# Altium PCB DB.PcbDoc (part 3 of 3)
Units mm, origin at the board's own origin, x right, y up, seen from the top; angles counter-clockwise.
Board outline 248 x 160 mm, 2 copper layers (Top Layer, Bottom Layer), stack 1.571 mm thick; 227 components, 245 nets, 960 pads, 72 vias.
Unrouted connection lines stored in the file: 1.
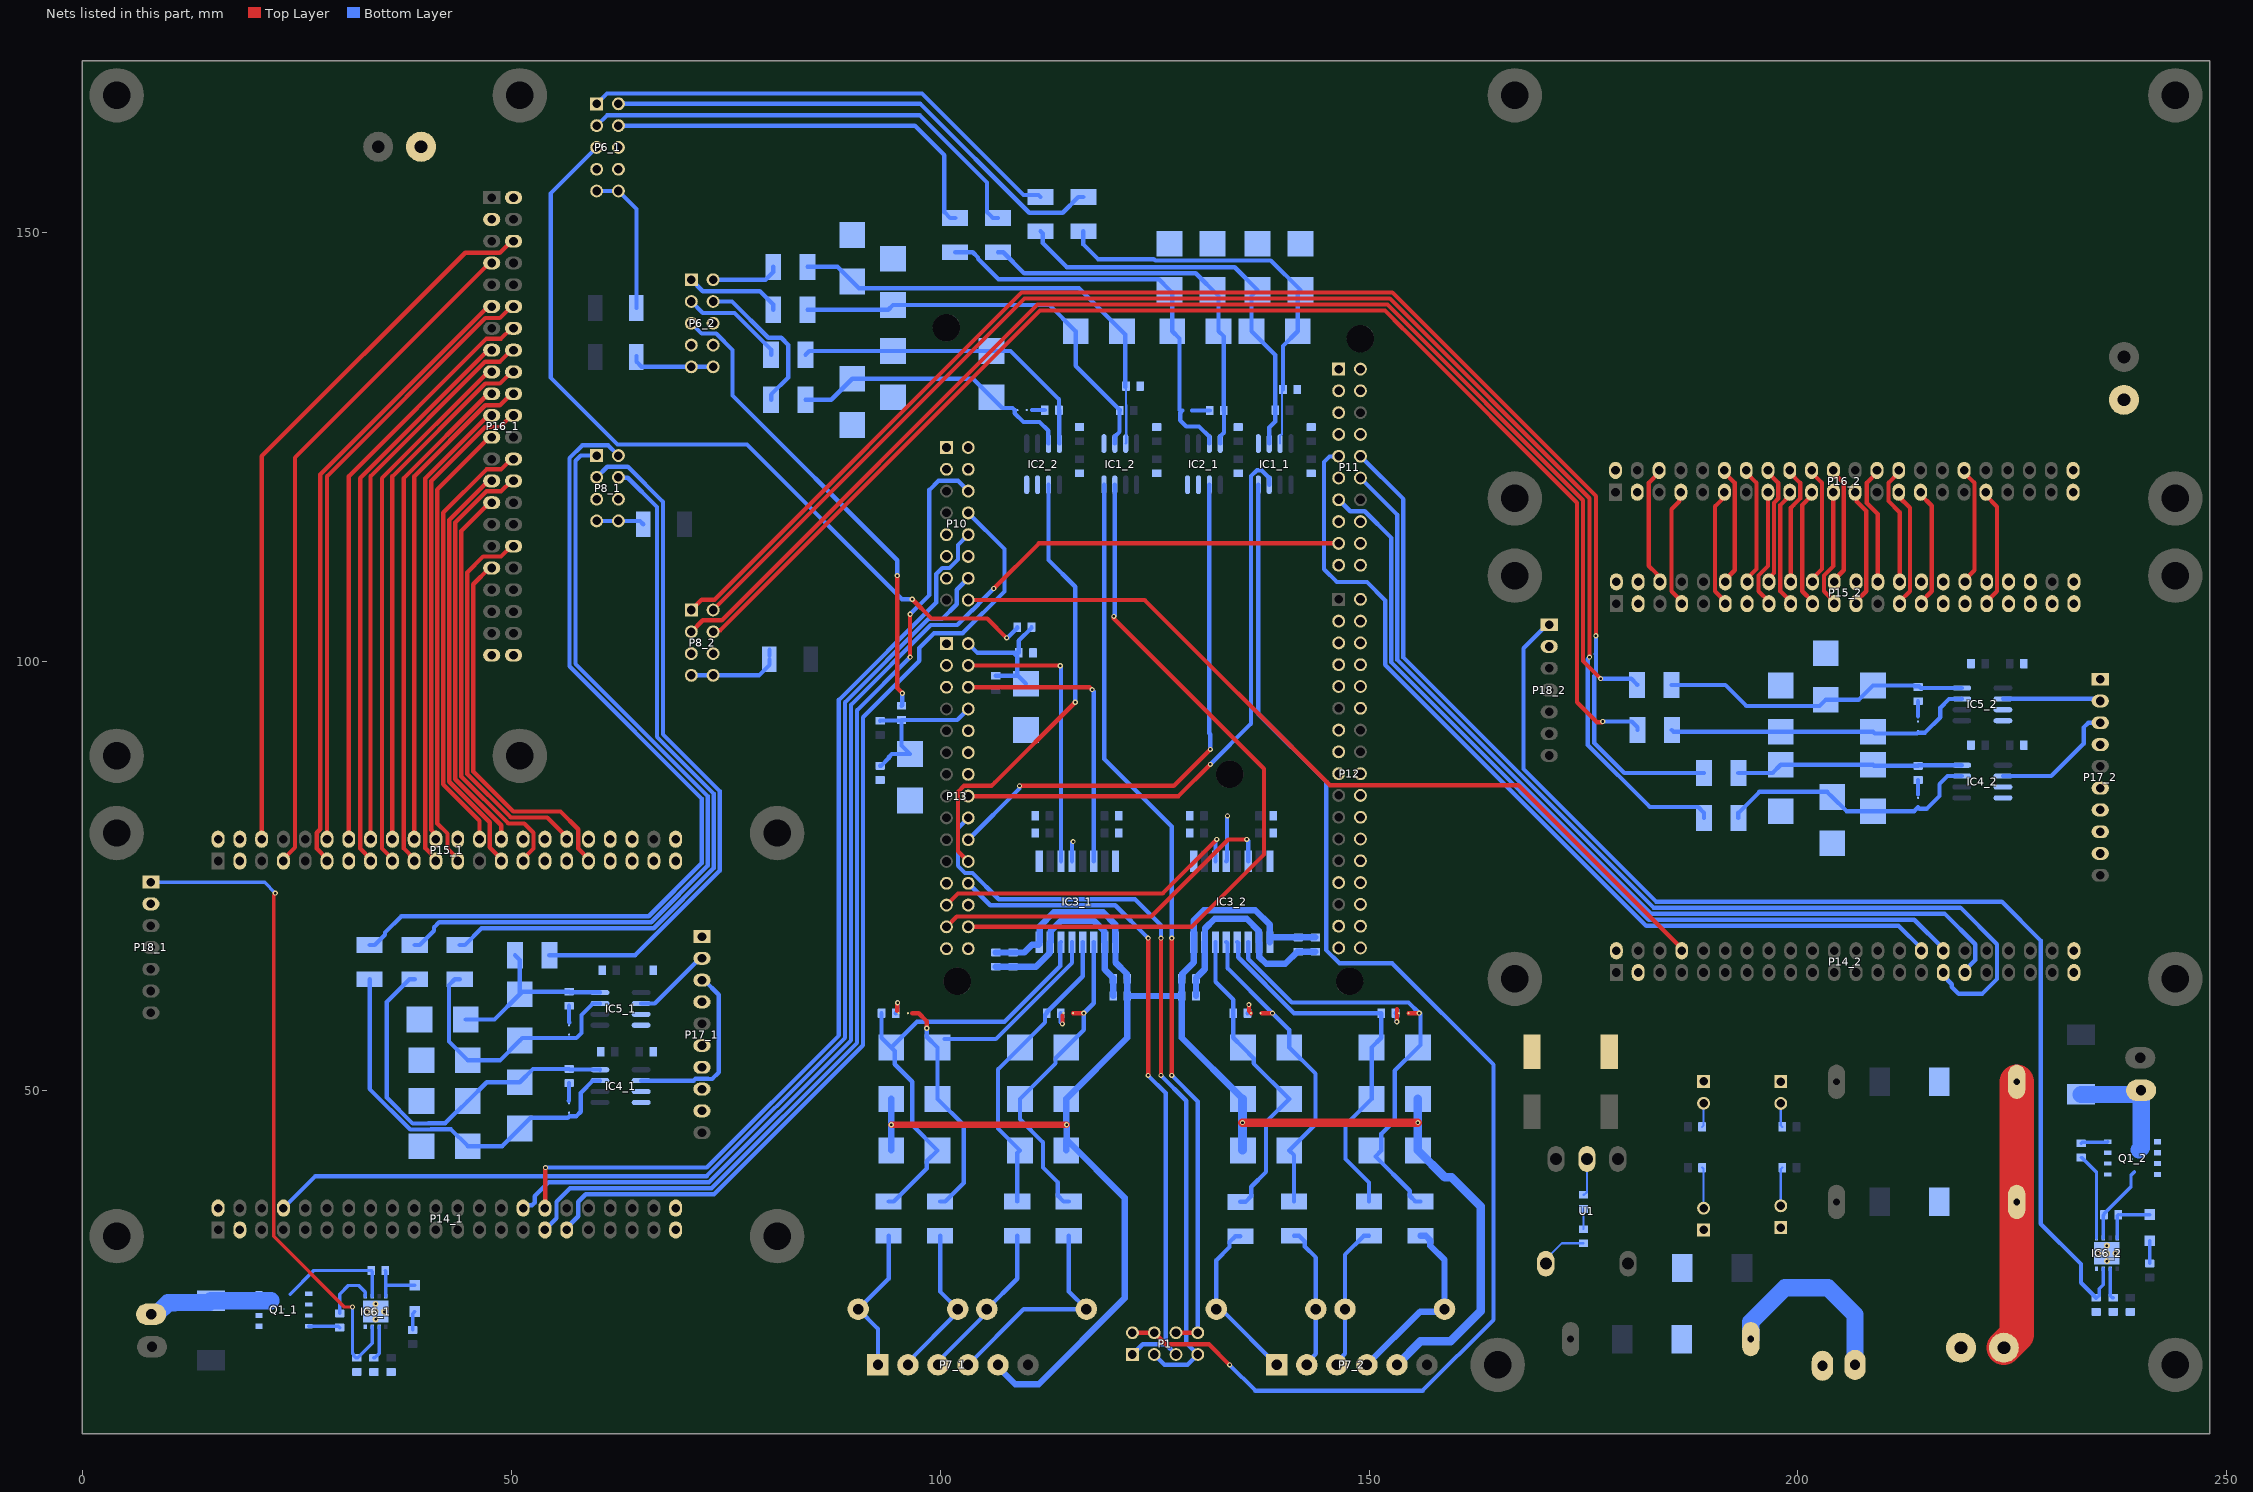
[diagram p2: the nets of this part, all layers, seen from the top]

## Via types
v1: diameter 0.6, hole 0.3, Top Layer to Bottom Layer, 60 vias
v2: diameter 0.7, hole 0.3, Top Layer to Bottom Layer, 10 vias
v3: diameter 1.27, hole 0.711, Top Layer to Bottom Layer, 2 vias

## Nets (pads, with @x,y where several pads share a name; then routed paths per layer and width w, separated by ;. In a path a pad name is that pad's centre, name@x,y a point inside that pad or via, vN(x,y) a via of type N, cw(c..) or ccw(c..) an arc to the next point about the centre after c; other vN are vias at no path point) (continued)
A+_1: F12_1.1 P8_1.1 | length 94.5
  Bottom Layer w0.5: F12_1.1@38.75,66.95 39.35,66.95 41,68.6 41,69 41.6,69.6 66.32,69.6 72.9,76.18 72.9,84.32 57.5,99.72 57.5,123.4 58.1,124 P8_1.1@59.96,124
A+_2: F12_2.1 P8_2.1 | length 173.7
  Top Layer w0.5: P8_2.1@71,106 72.2,107.2 73.7,107.2 109.5,143 152.72,143 176.45,119.27 v1(176.45,103)
  Bottom Layer w0.5: v1(176.45,103) 176.45,100.911 176.4,100.861 176.45,100.811 176.45,98.511 176.25,98.311 176.25,90.5 179.75,87 F12_2.1@189.05,87
A-_1: F13_1.1 P8_1.2 | length 103.2
  Bottom Layer w0.5: F13_1.1@33.5,66.95 34.1,66.95 35.3,68.15 35.3,68.4 37.2,70.3 66.03,70.3 72.2,76.47 72.2,84.03 56.8,99.43 56.8,123.7 58.3,125.2 61.3,125.2 P8_1.2@62.5,124
A-_2: F13_2.1 P8_2.2 | length 173.1
  Top Layer w0.5: P8_2.2@73.54,106 109.84,142.3 152.43,142.3 175.7,119.03 v1(175.7,100.5)
  Bottom Layer w0.5: v1(175.7,100.5) 175.7,100.473 175.5,100.273 175.5,90.26 182.735,83.025 188.375,83.025 189.05,82.35 F13_2.1@189.05,81.75
AGND: P12.3
az_br: IC6_1.3 P18_1.1 R18_1.2 | length 78.3
  Top Layer w0.4: v1(22.5,73) 22.5,72.946 22.3,72.746 22.3,33.011 30.561,24.75 v1(31.5,24.75)
  Bottom Layer w0.4: P18_1.1@8,74.28 8.03,74.25 21.25,74.25 v1(22.5,73) ; v1(31.5,24.75) 31.5,19.325 31.65,19.175 31.65,19.075 31.9,18.825 32.1,18.825 33.8,20.525 IC6_1.3@33.8,22.43
az_enc_A: IC4_1.2 P17_1.3 | length 21.2
  Bottom Layer w0.5: IC4_1.2@65.15,51.135 71.278,51.135 71.493,51.35 72.987,51.35 73.011,51.326 73.426,51.326 74.2,52.1 74.2,61.14 72.49,62.85 P17_1.3@72.24,62.85
az_enc_B: IC5_1.2 P17_1.2 | length 9.3
  Bottom Layer w0.5: IC5_1.2@65.15,60.135 66.735,60.135 71.99,65.39 P17_1.2@72.24,65.39
az_sai_fs: IC1_1.3 P13.16 | length 68.9
  Top Layer w0.5: P13.16@103.28,84.3 127.8,84.3 v1(131.5,88)
  Bottom Layer w0.5: v1(131.5,88) 136.25,92.75 136.25,121.616 136.927,122.293 137.472,122.293 138.365,121.4 IC1_1.3@138.365,120.6
az_sai_sck: P1.3 P1.7 P13.18 | length 90.6
  Top Layer w0.5: v1(125.75,51.75) v1(125.75,67.75)
  Bottom Layer w0.5: P13.18@103.354,81.686 P13.18@103.28,81.76 102.08,80.56 102.08,76.17 102.91,75.34 103.777,75.34 106.842,72.275 122.725,72.275 125.75,69.25 v1(125.75,67.75) ; P1.3@124.96,19.21 126.16,18.01 128.84,18.01 P1.7@130.04,19.21 128.7,20.55 128.7,48.8 v1(125.75,51.75)
az_sai_sck_dr: IC1_1.4 P1.2 P1.4 | length 160.6
  Top Layer w0.5: P1.2@122.42,21.75 P1.4@124.96,21.75 126.3,20.41 131.34,20.41 v1(133.75,18)
  Bottom Layer w0.5: v1(133.75,18) 136.75,15 156.25,15 164.5,23.25 164.5,53 152.69,64.81 146.553,64.81 145,66.363 145,86 137.095,93.905 IC1_1.4@137.095,120.6
az_sai_sd: IC2_1.2 P13.20 | length 63.7
  Top Layer w0.5: v1(109.25,85.5) 127.25,85.5 v1(131.5,89.75)
  Bottom Layer w0.5: P13.20@103.28,79.22 109.25,85.19 v1(109.25,85.5) ; IC2_1.2@131.385,120.6 131.385,91.642 131.5,91.527 v1(131.5,89.75)
az_spi_cs: P11.17 P14_1.30 | length 150.6
  Top Layer w0.5: v1(106.25,108.5) 111.514,113.764 P11.17@146.46,113.764
  Bottom Layer w0.5: P14_1.30@51.39,36.277 51.714,36.601 52.437,36.601 52.73,36.894 52.73,37.667 54.363,39.3 73.07,39.3 89.6,55.83 89.6,94.94 98.91,104.25 102,104.25 103.71,105.96 103.777,105.96 104.48,106.663 104.48,106.73 v1(106.25,108.5)
az_spi_en: P10.14 P14_1.8 | length 134.1
  Bottom Layer w0.5: P14_1.8@23.45,36.277 27.173,40 72.78,40 88.9,56.12 88.9,95.23 98.62,104.95 100.227,104.95 101.94,106.663 101.94,108.36 P10.14@103.28,109.7
az_spi_miso: P10.8 P14_1.33 | length 117.2
  Bottom Layer w0.5: P14_1.33@56.47,33.737 56.47,33.987 57.81,35.327 57.81,37.024 58.686,37.9 73.65,37.9 91,55.25 91,93.5 97.571,100.071 97.571,101.571 99.28,103.28 102.624,103.28 107.5,108.156 107.5,113.1 P10.8@103.28,117.32
az_spi_mosi: P10.10 P14_1.32 | length 110.5
  Top Layer w0.5: P14_1.32@53.93,36.277 53.965,36.312 53.965,40.965 v1(54,41)
  Bottom Layer w0.5: v1(54,41) 72.79,41 88.2,56.41 88.2,95.52 99.54,106.86 99.54,110.197 100.243,110.9 101.097,110.9 102.08,111.883 102.08,113.58 P10.10@103.28,114.78
az_spi_sck: P10.6 P14_1.31 | length 120
  Top Layer w0.5: v1@96.501,100.499 v1(96.5,105.5)
  Bottom Layer w0.5: P14_1.31@53.93,33.737 55.289,35.096 55.289,35.511 55.27,35.53 55.27,37.024 56.846,38.6 73.36,38.6 90.3,55.54 90.3,94.297 v1(96.502,100.498) ; v1(96.5,105.5) 98.75,107.75 98.75,120 99.81,121.06 102.08,121.06 P10.6@103.28,119.86
B+_1: F14_1.1 P8_1.3 | length 79.6
  Bottom Layer w0.5: F14_1.1@54.45,65.75 64.45,65.75 74.3,75.6 74.3,84.9 67.7,91.5 67.7,118.6 63.6,122.7 61.2,122.7 P8_1.3@59.96,121.46
B+_2: F14_2.1 P8_2.3 | length 155.4
  Top Layer w0.5: P8_2.3@71,103.46 72.34,104.8 74.56,104.8 111.36,141.6 152.14,141.6 174.95,118.79 174.95,100.05 v1(177,98)
  Bottom Layer w0.5: v1(177,98) 180.575,98 181.25,97.325 F14_2.1@181.25,97.25
B-_1: F15_1.1 P8_1.4 | length 84.1
  Bottom Layer w0.5: F15_1.1@44,66.95 44.6,66.95 46.55,68.9 66.61,68.9 73.6,75.89 73.6,84.61 67,91.21 67,118 63.581,121.419 62.541,121.419 P8_1.4@62.5,121.46
B-_2: F15_2.1 P8_2.4 | length 157.3
  Top Layer w0.5: P8_2.4@73.54,103.46 73.731,103.651 74.401,103.651 111.65,140.9 151.85,140.9 153.9,138.85 ; 154,138.75 174.25,118.5 174.25,95.25 176.58,92.92 177.17,92.92 v1(177.25,93)
  Bottom Layer w0.5: v1(177.25,93) 180.625,93 181.3,92.325 F15_2.1@181.3,92
ccw_button_az: C3_1.2 D11_1.2 P13.2 R10_1.2 R11_1.1 | length 16.6
  Bottom Layer w0.5: P13.2@103.28,102.08 104.36,101 108.675,101 ; R10_1.2@106.5,98.325 D11_1.2@109,98.325 ; D11_1.2@110,97.4 109.075,98.325 D11_1.2@109,98.325 ; R11_1.1@110.65,104 110.65,103.9 109.175,102.425 C3_1.2@109.175,101 108.675,101 ; 108.675,101 108.675,100.9 109,100.575 D11_1.2@109,98.325
ccw_button_el: C3_2.2 D11_2.2 P13.8 R10_2.2 R11_2.1 | length 19.4
  Bottom Layer w0.5: C3_2.2@93,87.825 93.1,87.825 94.007,88.732 94.007,88.832 94.375,89.2 D11_2.2@96.5,89.2 95.5,90.2 R11_2.1@95.5,93.175 ; R10_2.2@93,93.075 93.05,93.125 95.45,93.125 R11_2.1@95.5,93.175 ; P13.8@103.28,94.46 101.995,93.175 R11_2.1@95.5,93.175
ccw_in_1: P6_1.5 R11_1.2 | length 96.6
  Top Layer w0.5: v1(96.75,107.25) 99,105 105.5,105 v1(107.75,102.75)
  Bottom Layer w0.5: P6_1.5@59.96,159.92 54.6,154.56 54.6,133.1 62.4,125.3 77.5,125.3 95.55,107.25 v1(96.75,107.25) ; v1(107.75,102.75) 107.769,102.769 107.869,102.769 109,103.9 R11_1.2@109,104
ccw_in_2: P6_2.5 R11_2.2 | length 55.8
  Top Layer w0.5: v1(95,110) 95,96.9 v1(95.6,96.3)
  Bottom Layer w0.5: P6_2.5@71,139.42 72.2,138.22 73.897,138.22 75.8,136.317 75.8,131 95,111.8 v1(95,110) ; R11_2.2@95.5,94.825 95.581,94.906 95.581,96.281 v1(95.6,96.3)
clock+_1: F5_1.1 P6_1.1 | length 57.2
  Bottom Layer w0.5: P6_1.1@59.96,165 61.16,166.2 97.9,166.2 109.718,154.382 111.468,154.382 F5_1.1@111.7,154.15
clock+_2: F5_2.1 P6_2.1 | length 11.4
  Bottom Layer w0.5: P6_2.1@71,144.5 72.34,143.16 78.99,143.16 80.55,141.6 F5_2.1@80.55,141
clock-_1: F4_1.1 P6_1.2 | length 60.3
  Bottom Layer w0.5: P6_1.2@62.5,165 97.7,165 110.4,152.3 114.3,152.3 115,153 115.425,153.425 115.425,153.475 116.1,154.15 F4_1.1@116.7,154.15
clock-_2: F4_2.1 P6_2.2 | length 8
  Bottom Layer w0.5: P6_2.2@73.54,144.5 79.65,144.5 80.55,145.4 F4_2.1@80.55,146
data+_1: F6_1.1 P6_1.3 | length 54.3
  Bottom Layer w0.5: P6_1.3@59.96,162.46 61.16,163.66 97.64,163.66 105.475,155.825 105.475,152.375 106.15,151.7 F6_1.1@106.75,151.7
data+_2: F6_2.1 P6_2.3 | length 12.2
  Bottom Layer w0.5: P6_2.3@71,141.96 72.34,140.62 76.03,140.62 80.3,136.35 F6_2.1@80.3,135.75
data-_1: F7_1.1 P6_1.4 | length 47.6
  Bottom Layer w0.5: P6_1.4@62.5,162.46 97.04,162.46 100.495,159.005 100.495,152.375 101.17,151.7 F7_1.1@101.75,151.7
data-_2: F7_2.1 P6_2.4 | length 18.1
  Bottom Layer w0.5: P6_2.4@73.54,141.96 75.74,141.96 79.975,137.725 81.475,137.725 82.3,136.9 82.3,133.1 80.3,131.1 F7_2.1@80.3,130.5
el_br: IC6_2.3 P18_2.1 R18_2.2 | length 134.9
  Bottom Layer w0.4: R18_2.2@234.75,25.825 234.85,25.825 235.1,26.075 235.1,26.85 235.6,27.35 IC6_2.3@235.6,29.215
  Bottom Layer w0.5: P18_2.1@171,104.28 170.75,104.28 168,101.53 168,87.46 183.46,72 223.75,72 228.29,67.46 228.29,34.46 233,29.75 233,27.575 R18_2.2@234.75,25.825
el_enc_A: IC4_2.2 P17_2.3 | length 15
  Bottom Layer w0.5: IC4_2.2@223.9,86.635 229.535,86.635 233.3,90.4 233.3,92.3 233.85,92.85 P17_2.3@235.24,92.85
el_enc_B: IC5_2.2 P17_2.2 | length 11.4
  Bottom Layer w0.5: IC5_2.2@223.9,95.635 234.474,95.635 234.719,95.39 P17_2.2@235.24,95.39
el_sai_fs: IC1_2.3 P13.28 | length 88.4
  Top Layer w0.5: P13.28@103.28,69.06 129.31,69.06 137.75,77.5 137.75,87.5 120.25,105 v1(120.25,105.25)
  Bottom Layer w0.5: v1(120.25,105.25) 120.25,105.277 120.365,105.392 IC1_2.3@120.365,120.6
el_sai_sck: P1.1 P1.5 P13.24 | length 77.9
  Top Layer w0.5: v1(124.25,51.75) v1(124.25,67.75)
  Bottom Layer w0.5: P13.24@103.28,74.14 105.845,71.575 112.908,71.575 120.425,71.575 v1(124.25,67.75) ; P1.1@122.42,19.21 123.62,20.41 126.3,20.41 ; v1(124.25,51.75) 126.3,49.7 126.3,20.41 ; P1.5@127.5,19.21 126.3,20.41
el_sai_sck_dr: IC1_2.4 P1.6 P1.8 | length 105.9
  Top Layer w0.5: v1(127,51.75) v1(127,67.75) ; P1.6@127.5,21.75 P1.8@130.04,21.75
  Bottom Layer w0.5: IC1_2.4@119.095,120.6 119.128,120.567 119.128,88.622 127,80.75 v1(127,67.75) ; v1@127.019,51.731 130.04,48.71 P1.8@130.04,21.75
el_sai_sd: IC2_2.2 P13.22 | length 53.4
  Top Layer w0.5: P13.22@103.28,76.68 102.08,77.88 102.08,84.797 102.783,85.5 106,85.5 106.349,85.849 v1(115.75,95.25)
  Bottom Layer w0.5: P13.22@103.28,76.68 P13.22@103.46,76.68 ; IC2_2.2@112.635,120.6 112.635,111.819 115.75,108.704 v1(115.75,95.25)
el_spi_cs: P11.9 P14_2.30 | length 107.1
  Bottom Layer w0.5: P11.9@146.46,123.924 146.417,123.881 145.381,123.881 144.75,123.25 144.75,110.75 146.25,109.25 149.75,109.25 151.9,107.1 151.9,100.957 151.9,99.6 182.3,69.2 211.717,69.2 214.39,66.527 P14_2.30@214.39,66.277
el_spi_en: P10.16 P14_2.8 | length 100.3
  Top Layer w0.5: P10.16@103.28,107.16 123.84,107.16 145.42,85.58 167.397,85.58 186.45,66.527 P14_2.8@186.45,66.277
el_spi_miso: P11.12 P14_2.33 | length 107.9
  Bottom Layer w0.5: P11.12@149,121.384 153.3,117.084 153.3,101.537 153.3,100.18 182.88,70.6 217.094,70.6 220.67,67.024 220.67,65.187 219.47,63.987 P14_2.33@219.47,63.737
el_spi_mosi: P11.13 P14_2.32 | length 100.9
  Bottom Layer w0.5: P11.13@146.46,118.844 147.8,117.504 149.497,117.504 152.6,114.401 152.6,101.247 152.6,99.89 182.59,69.9 213.557,69.9 216.93,66.527 P14_2.32@216.93,66.277
el_spi_sck: P11.10 P14_2.31 | length 121
  Bottom Layer w0.5: P11.10@149,123.924 154,118.924 154,100.47 183.17,71.3 218.934,71.3 223.21,67.024 223.21,62.99 221.47,61.25 218.75,61.25 217.936,62.064 217.936,62.371 216.93,63.377 P14_2.31@216.93,63.737
ENC1_N_IN_1: P17_1.1
ENC1_N_IN_2: P17_2.1
ENC2_A_IN_1: P17_1.8
ENC2_A_IN_2: P17_2.8
ENC2_B_IN_1: P17_1.7
ENC2_B_IN_2: P17_2.7
ENC2_N_IN_1: P17_1.6
ENC2_N_IN_2: P17_2.6
GND: C1.2 C2.2 C3_1.1 C3_2.1 C4_1.1 C4_2.1 C5_1.1 C5_2.1 C6_1.1 C6_2.1 C7_1.1 C7_2.1 C8_1.2 C8_2.2 C9_1.2 C9_2.2 C12_1.1 C12_2.1 C13_1.1 C13_2.1 C16_1.1 C16_2.1 C17_1.1 C17_2.1 C18_1.1 C18_2.1 C19_1.1 C19_2.1 C20_1.2 C20_2.2 D1.2 D2.2 D3.1 D4.2 D5_1.1 D5_2.1 D7_1.1 D7_2.1 D8_1.1 D8_2.1 D10_1.1 D10_2.1 D11_1.1 D11_2.1 D18_1.1 D18_2.1 D20_1.1 D20_2.1 D21_1.1 D21_2.1 D23_1.1 D23_2.1 IC1_1.5 IC1_2.5 IC2_1.3 IC2_1.4 IC2_2.3 IC2_2.4 IC3_1.1 IC3_1.4 IC3_1.8 IC3_2.1 IC3_2.4 IC3_2.8 IC4_1.3 IC4_1.4 IC4_2.3 IC4_2.4 IC5_1.3 IC5_1.4 IC5_2.3 IC5_2.4 IC6_1.4 IC6_1.9 IC6_2.4 IC6_2.9 LD1.1 LD2.1 LD3.1 LD4.1 P2.1 P3.1 P4.1 P5.1 P6_1.6 P6_1.7 P6_1.8 P6_2.6 P6_2.7 P6_2.8 P8_1.5 P8_1.6 P8_2.5 P8_2.6 P10.9 P10.11 P11.8 P12.5 P12.17 P12.22 P12.27 P13.12 P13.23 P14_1.2 P14_1.3 P14_1.43 P14_1.44 P14_2.2 P14_2.3 P14_2.43 P14_2.44 P15_1.2 P15_1.3 P15_1.43 P15_1.44 P15_2.2 P15_2.3 P15_2.43 P15_2.44 P16_1.2 P16_1.3 P16_1.43 P16_1.44 P16_2.2 P16_2.3 P16_2.43 P16_2.44 P17_1.4 P17_1.9 P17_2.4 P17_2.9 P18_1.2 P18_2.2 Q1_1.1 Q1_1.2 Q1_1.3 Q1_2.1 Q1_2.2 Q1_2.3 R6.1 R8_1.1 R8_2.1 R18_1.1 R18_2.1 R19_1.1 R19_2.1 U1.2 | length 12.1
  Bottom Layer w0.25: R6.1@175,37.825 175.075,37.825 175.4,38.15 U1.2@175.4,42
  Bottom Layer w0.5: IC3_1.4@115.365,76.71 115.365,78.865 v1(115.5,79) ; IC3_2.4@133.365,76.71 133.432,76.778 133.432,81.933 v1(133.5,82)
  other v2: 34.2,23.315 33.2,24.215 34.2,24.215 35.2,24.215 34.2,25.115 236,30.1 235,31 236,31 237,31 236,31.9
GND_line: C10_1.2 C10_2.2 C11_1.2 C11_2.2 C14_1.1 C14_2.1 C15_1.1 C15_2.1 D12_1.1 D12_2.1 D13_1.1 D13_2.1 D15_1.1 D15_2.1 D17_1.1 D17_2.1 IC3_1.9 IC3_1.16 IC3_2.9 IC3_2.16 P7_1.5 P7_2.5 | length 230.8
  Top Layer w0.75: v1(94.3,46) v1(114.75,46)
  Top Layer w1: v1(135.25,46.25) v1(155.7,46.25)
  Bottom Layer w0.15: v1@94.3,45.75 v1(94.3,46)
  Bottom Layer w0.75: D12_1.1@94.3,43 v1@94.3,45.75 ; v1(94.3,46) D13_1.1@94.3,49 ; P7_1.5@106.25,18.25 108.75,15.75 111.5,15.75 121.5,25.75 121.5,37.5 114.75,44.25 v1(114.75,46) ; C11_1.2@106.5,66.075 C10_1.2@108.5,66.075 109.825,66.075 110.75,67 111.505,67 111.555,67.05 IC3_1.16@111.555,67.29 111.605,67.34 111.605,69.105 113.25,70.75 119,70.75 120.395,69.355 120.395,67.34 IC3_1.9@120.445,67.29 120.445,64.915 121.75,63.61 121.75,63.075 C15_1.1@121.825,63 C14_1.1@121.825,61 ; D15_1.1@114.7,43 D15_1.1@114.7,44.25 ; v1@114.7,46 D17_1.1@114.7,49 121.825,56.125 C14_1.1@121.825,61 ; D12_2.1@135.3,49 128.175,56.125 C11_2.2@128.175,61 ; IC3_2.9@138.445,67.29 IC3_2.9@138.445,67.775 ; C15_2.1@143.75,67.825 138.495,67.825 IC3_2.9@138.445,67.775 ; C14_1.1@121.825,61 C11_2.2@128.175,61 ; C11_2.2@128.175,61 C14_2.1@128.175,63 128.25,63.075 128.25,63.61 129.555,64.915 IC3_2.16@129.555,67.29 129.555,69.805 130.75,71 136.75,71 138.445,69.305 IC3_2.9@138.445,67.775
  Bottom Layer w1: D13_2.1@135.3,43 135.25,43.05 v1(135.25,46.25) 135.25,48.95 D12_2.1@135.3,49 ; P7_2.5@153.25,18 156,20.75 159.5,20.75 163,24.25 163,36.5 159.625,39.875 158.825,39.875 D17_2.1@155.7,43 v1(155.7,46.25) D15_2.1@155.7,49
IOREF: P10.1
NetC10_1_1: C10_1.1 C11_1.1 C14_1.2 C15_1.2 IC3_1.10 IC3_1.15 | length 24.7
  Bottom Layer w0.75: C11_1.1@106.5,64.425 C10_1.1@108.5,64.425 111.175,64.425 112.215,65.465 112.218,65.465 112.775,66.022 112.775,67.24 IC3_1.15@112.825,67.29 112.875,67.34 112.875,68.558 114.067,69.75 117.933,69.75 119.125,68.558 119.125,67.34 IC3_1.10@119.175,67.29 119.175,64.1 120.175,63.1 C15_1.2@120.175,63 C14_1.2@120.175,61
NetC10_2_1: C10_2.1 C11_2.1 C14_2.2 C15_2.2 IC3_2.10 IC3_2.15 | length 26.2
  Bottom Layer w0.75: C11_2.1@129.825,61 C14_2.2@129.825,63 ; C14_2.2@129.825,63 129.825,63.1 130.825,64.1 IC3_2.15@130.825,67.29 130.875,67.34 130.875,68.875 132,70 135.75,70 137.125,68.625 137.125,67.34 137.225,67.24 137.225,65.525 138,64.75 140.225,64.75 141.65,66.175 C10_2.1@141.75,66.175 C15_2.2@143.75,66.175
NetC21_1_1: C21_1.1 D25_1.1 IC6_1.8 | length 6.5
  Bottom Layer w0.4: C21_1.1@35.325,29 35.4,28.925 35.4,27.463 ; IC6_1.8@35.4,26 35.4,27.463 ; D25_1.1@38.75,27.275 35.588,27.275 35.4,27.463
NetC21_1_2: C21_1.2 D24_1.2 IC6_1.6 P9_1.1 Q1_1.5 Q1_1.6 Q1_1.7 Q1_1.8 Q1_1.9 | length 28.3
  Bottom Layer w0.4: 24.25,26.25 27,29 29.5,29 C21_1.2@33.675,29 33.8,28.875 IC6_1.6@33.8,26
  Bottom Layer w2: P9_1.1@8.027,23.9 8.662,23.9 10.012,25.25 10.75,25.25 10.775,25.275 14.8,25.275 D24_1.2@15,25.475 21.975,25.475 22,25.5
NetC21_2_1: C21_2.1 D25_2.1 IC6_2.8 | length 6.2
  Bottom Layer w0.4: IC6_2.8@237.2,32.785 237.2,35.375 C21_2.1@237.325,35.5 ; C21_2.1@237.575,35.5 240.975,35.5 D25_2.1@241,35.525
NetC21_2_2: C21_2.2 D24_2.2 IC6_2.6 P9_2.1 Q1_2.5 Q1_2.6 Q1_2.7 Q1_2.8 Q1_2.9 | length 23.4
  Bottom Layer w0.4: IC6_2.6@235.6,32.785 235.6,35.425 C21_2.2@235.675,35.5 235.675,35.6 238.825,38.75 238.825,40.095 239.23,40.5
  Bottom Layer w2: D24_2.2@233,49.525 238.89,49.525 239.269,49.904 P9_2.1@239.904,49.904 ; 239.75,43.03 240.025,43.305 240.025,49.975 P9_2.1@240,50
NetD5_1_2: D5_1.2 D6_1.2 F4_1.0 IC1_1.7 R8_1.2 | length 47.9
  Bottom Layer w0.25: IC1_1.7@139.635,125.4 139.635,126.295 139.85,126.51 139.85,131.575 R8_1.2@139.975,131.7
  Bottom Layer w0.5: F4_1.0@116.7,150.15 116.7,148.6 118.4,146.9 124.914,146.9 125.064,146.75 138.55,146.75 D5_1.2@142,143.3 141.7,143 D6_1.2@141.7,138.5 139.975,136.775 R8_1.2@139.975,131.7
NetD5_2_2: D5_2.2 D6_2.2 F4_2.0 IC1_2.7 R8_2.2 | length 53.1
  Bottom Layer w0.25: IC1_2.7@121.635,125.4 121.7,125.465 121.7,129.906 121.675,129.931 R8_2.2@121.675,132.1
  Bottom Layer w0.5: F4_2.0@84.55,146 88.05,146 90.55,143.5 116.2,143.5 D6_2.2@121.2,138.5 121.575,138.125 R8_2.2@121.575,132
NetD6_1_1: D6_1.1 D7_1.2 F5_1.0 IC1_1.6 R7_1.2 | length 48.4
  Bottom Layer w0.5: F5_1.0@111.7,150.15 111.964,149.886 111.964,148.768 114.775,145.957 134.343,145.957 D7_1.2@137,143.3 136.3,142.6 D6_1.1@136.3,138.5 139.075,135.725 R7_1.2@139.075,129.3 139.075,127.975 138.365,127.265 IC1_1.6@138.365,125.4
NetD6_2_1: D6_2.1 D7_2.2 F5_2.0 IC1_2.6 R7_2.2 | length 48.2
  Bottom Layer w0.5: F5_2.0@84.55,141 93.95,141 D7_2.2@94.5,141.55 112.75,141.55 D6_2.1@115.8,138.5 115.8,134.475 120.925,129.35 R7_2.2@120.925,129.25 120.9,129.225 120.9,126.762 120.365,126.227 IC1_2.6@120.365,125.4
NetD8_1_2: D8_1.2 D9_1.2 F6_1.0 IC2_1.8 R9_1.2 | length 45.5
  Bottom Layer w0.5: F6_1.0@106.75,147.7 107.35,147.7 109.793,145.257 129.793,145.257 132.45,142.6 D9_1.2@132.45,138.5 133.075,137.875 R9_1.2@133.075,129.25 133.1,129.225 133.1,126.672 132.655,126.227 IC2_1.8@132.655,125.4
NetD8_2_2: D8_2.2 D9_2.2 F6_2.0 IC2_2.8 R9_2.2 | length 37.2
  Bottom Layer w0.5: F6_2.0@84.3,135.75 84.75,136.2 D8_2.2@94.5,136.2 D9_2.2@106,136.2 108.2,136.2 113.85,130.55 R9_2.2@113.85,129.3 113.886,129.264 113.886,125.419 IC2_2.8@113.905,125.4
NetD9_1_1: D9_1.1 D10_1.2 F7_1.0 IC2_1.7 SB1_1.1 | length 47.6
  Bottom Layer w0.5: F7_1.0@101.75,147.7 103.8,147.7 104.419,147.081 104.419,146.944 106.814,144.55 125.5,144.55 D10_1.2@126.75,143.3 127.05,143 D9_1.1@127.05,138.5 127.9,137.65 127.9,129.3 ; SB1_1.1@128.25,129.25 128,129 128,128.1 128.7,127.4 130.185,127.4 131.385,126.2 IC2_1.7@131.385,125.4
NetD9_2_1: D9_2.1 D10_2.2 F7_2.0 IC2_2.7 SB1_2.1 | length 33.6
  Bottom Layer w0.5: F7_2.0@84.3,130.5 87.3,130.5 D10_2.2@89.75,132.95 103.85,132.95 D9_2.1@106,130.8 107.25,129.55 108.45,129.55 108.7,129.3 108.7,128.921 109.71,127.91 111.59,127.91 112.616,126.884 112.616,125.419 IC2_2.7@112.635,125.4
NetD12_1_2: D12_1.2 D14_1.1 F8_1.0 IC3_1.14 R12_1.2 | length 53.8
  Bottom Layer w0.5: R12_1.2@93.175,59 93.175,56.125 D14_1.1@94.3,55 ; F8_1.0@94,37.05 94.6,37.05 98.45,40.9 98.45,41.75 D12_1.2@99.7,43 96.75,45.95 96.75,51 94.707,53.043 94.707,54.593 D14_1.1@94.3,55 ; IC3_1.14@114.095,67.29 114,67.195 114,64.5 107.5,58 97.3,58 D14_1.1@94.3,55
NetD12_2_2: D12_2.2 D14_2.1 F8_2.0 IC3_2.14 R12_2.2 | length 36.6
  Bottom Layer w0.5: IC3_2.14@132.095,67.29 132.095,62.655 134.175,60.575 R12_2.2@134.175,59 134.175,56.125 D14_2.1@135.3,55 136.55,53.75 136.55,53.15 D12_2.2@140.7,49 138,46.3 138,40.5 136.275,38.775 136.275,37.675 135.6,37 F8_2.0@135,37
NetD13_1_2: D13_1.2 D14_1.2 F9_1.0 IC3_1.13 SB2_1.1 | length 47.3
  Top Layer w0.5: 96.75,59 97.5,59 98.431,58.069 98.431,57.269 v1(98.45,57.25)
  Bottom Layer w0.5: v1(98.45,57.25) 98.45,56.25 D14_1.2@99.7,55 D13_1.2@99.7,49 102.75,45.95 102.75,39.2 100.6,37.05 F9_1.0@100,37.05 ; D14_1.2@100.5,56 106.5,56 115.365,64.865 IC3_1.13@115.365,67.29
NetD13_2_2: D13_2.2 D14_2.2 F9_2.0 IC3_2.13 SB2_2.1 | length 37.3
  Top Layer w0.5: 137.5,59 v1(138.75,59)
  Bottom Layer w0.5: IC3_2.13@133.365,67.29 133.5,67.155 133.5,64.25 v1(138.75,59) 140.7,57.05 D14_2.2@140.7,55 143.75,51.95 143.75,46.05 D13_2.2@140.7,43 141.25,42.45 F9_2.0@141.25,37.05
NetD15_1_2: D15_1.2 D16_1.2 F10_1.0 IC3_1.12 R13_1.2 | length 35.5
  Bottom Layer w0.5: F10_1.0@109,37.05 109,42.7 D15_1.2@109.3,43 106.75,45.55 106.75,52.45 D16_1.2@109.3,55 112.225,57.925 112.225,58.8 R13_1.2@112.425,59 112.425,59.1 116.635,63.31 IC3_1.12@116.635,67.29
NetD15_2_2: D15_2.2 D16_2.2 F10_2.0 IC3_2.12 R13_2.2 | length 46
  Bottom Layer w0.5: IC3_2.12@134.635,67.29 134.75,67.175 134.75,65.51 141.26,59 R13_2.2@151.425,59 151.425,56.125 D16_2.2@150.3,55 D15_2.2@150.3,49 147.25,45.95 147.25,42 150,39.25 F10_2.0@150,37.05
NetD16_1_1: D16_1.1 D17_1.2 F11_1.0 IC3_1.11 SB3_1.1 | length 37.8
  Top Layer w0.5: SB3_1.1@115.5,59 v1(116.75,59)
  Bottom Layer w0.5: F11_1.0@115,37.05 114.4,37.05 113.725,37.725 113.725,39.275 112,41 112,43.936 109.3,46.636 D17_1.2@109.3,49 113.45,53.15 113.45,53.75 D16_1.1@114.7,55 116.75,57.05 v1(116.75,59) 117.905,60.155 IC3_1.11@117.905,67.29
NetD16_2_1: D16_2.1 D17_2.2 F11_2.0 IC3_2.11 SB3_2.1 | length 52.4
  Top Layer w0.5: SB3_2.1@154.6,59 v1(155.85,59)
  Bottom Layer w0.5: IC3_2.11@135.905,67.29 135.905,65.345 141,60.25 154.6,60.25 v1(155.85,59) ; F11_2.0@155.4,37.05 F11_2.0@155.42,37.05 ; F11_2.0@156,37.05 F11_2.0@155.42,37.05 ; v1@156,59 156,55.3 D16_2.1@155.7,55 153,52.3 153,46.5 151.43,44.93 151.43,42.98 150.75,42.3 154.745,38.305 154.745,37.725 F11_2.0@155.42,37.05
NetD18_1_2: D18_1.2 D19_1.2 F12_1.0 IC4_1.8 R14_1.2 | length 44.3
  Bottom Layer w0.5: F12_1.0@38.75,62.95 38.15,62.95 35.5,60.3 35.5,49.164 38.514,46.15 40.315,46.15 40.322,46.157 42.3,46.157 43.643,47.5 43.7,47.5 D18_1.2@44.95,48.75 47.15,50.95 D19_1.2@51,50.95 52.55,52.5 R14_1.2@56.75,52.5 56.826,52.424 60.331,52.424 IC4_1.8@60.35,52.405
NetD18_2_2: D18_2.2 D19_2.2 F12_2.0 IC4_2.8 R14_2.2 | length 26.5
  Bottom Layer w0.5: F12_2.0@193.05,87 197.05,87 D18_2.2@198,87.95 D19_2.2@208.75,87.95 208.875,87.825 R14_2.2@214,87.825 214.061,87.886 219.081,87.886 IC4_2.8@219.1,87.905
NetD19_1_1: D19_1.1 D20_1.2 F13_1.0 IC4_1.7 SB4_1.1 | length 46.8
  Bottom Layer w0.5: F13_1.0@33.5,62.95 33.5,50.174 38.224,45.45 40.605,45.45 40.612,45.457 42.993,45.457 D20_1.2@44.95,43.5 48.95,43.5 D19_1.1@51,45.55 52.25,46.8 56.6,46.8 56.8,47 57.6,47 58.1,47.5 58.1,49.685 59.55,51.135 IC4_1.7@60.35,51.135
NetD19_2_1: D19_2.1 D20_2.2 F13_2.0 IC4_2.7 SB4_2.1 | length 31.2
  Bottom Layer w0.5: F13_2.0@193.05,81.75 193.05,82.35 195.5,84.8 203.4,84.8 D20_2.2@204,84.2 205.65,82.55 D19_2.1@208.75,82.55 213.55,82.55 SB4_2.1@214,83 214.16,82.84 215.026,82.84 216.5,84.314 216.5,85.7 217.435,86.635 IC4_2.7@219.1,86.635
NetD21_1_2: D21_1.2 D22_1.2 F14_1.0 IC5_1.8 R15_1.2 | length 21.8
  Bottom Layer w0.5: D21_1.2@44.7,58.25 48.05,58.25 D22_1.2@51,61.2 ; F14_1.0@50.45,65.75 51,65.2 D22_1.2@51,61.2 ; IC5_1.8@60.35,61.405 60.331,61.424 56.826,61.424 R15_1.2@56.75,61.5 51.3,61.5 D22_1.2@51,61.2
NetD21_2_2: D21_2.2 D22_2.2 F14_2.0 IC5_2.8 R15_2.2 | length 36
  Bottom Layer w0.5: F14_2.0@185.25,97.25 191.537,97.25 193.987,94.8 202.5,94.8 D21_2.2@203.25,95.55 207.1,95.55 D22_2.2@208.75,97.2 213.525,97.2 213.6,97.125 214,97.125 214.1,97.125 214.32,96.905 IC5_2.8@219.1,96.905
NetD22_1_1: D22_1.1 D23_1.2 F15_1.0 IC5_1.7 SB5_1.1 | length 30.6
  Bottom Layer w0.5: F15_1.0@44,62.95 43.425,62.95 42.75,62.275 42.75,55.7 D23_1.2@44.95,53.5 48.7,53.5 D22_1.1@51,55.8 51.3,56.1 57.6,56.1 58.2,56.7 58.2,58.785 59.55,60.135 IC5_1.7@60.35,60.135
NetD22_2_1: D22_2.1 D23_2.2 F15_2.0 IC5_2.7 SB5_2.1 | length 36.3
  Bottom Layer w0.5: F15_2.0@185.3,92 185.5,91.8 D23_2.2@198,91.8 D22_2.1@208.75,91.8 208.95,91.6 213.9,91.6 214,91.7 214.8,91.7 216.6,93.5 216.6,94.6 217.616,95.616 219.081,95.616 IC5_2.7@219.1,95.635
NetD25_1_2: D25_1.2 R16_1.2 | length 2.3
  Bottom Layer w0.4: R16_1.2@38.5,22.075 38.5,23.975 D25_1.2@38.75,24.225
NetD25_2_2: D25_2.2 R16_2.2 | length 2.6
  Bottom Layer w0.4: R16_2.2@241,29.825 D25_2.2@241,32.475
NetF1_1: F1.1 F2.1 P3.2 | length 31.6
  Top Layer w4: P3.2@224,20 225.5,21.5 F1.1@225.5,37 F2.1@225.5,51
NetF3_1: F3.1 P5.2 | length 23
  Bottom Layer w2: F3.1@194.5,21 194.5,23 198.5,27 203.5,27 206.65,23.85 P5.2@206.65,18
NetFU1_1_1: FU1_1.1 P6_1.9 P6_1.10 | length 17
  Bottom Layer w0.5: P6_1.9@59.96,154.84 P6_1.10@62.5,154.84 64.6,152.74 FU1_1.1@64.6,141.2
NetFU1_2_1: FU1_2.1 P6_2.9 P6_2.10 | length 9.8
  Bottom Layer w0.5: FU1_2.1@64.6,135.6 64.6,134.95 65.2,134.35 70.99,134.35 P6_2.9@71,134.34 P6_2.10@73.54,134.34
NetFU2_1_1: FU2_1.1 P8_1.7 P8_1.8 | length 5.6
  Bottom Layer w0.5: P8_1.7@59.96,116.38 P8_1.8@62.5,116.38 65.02,116.38 FU2_1.1@65.4,116
NetFU2_2_1: FU2_2.1 P8_2.7 P8_2.8 | length 10.9
  Bottom Layer w0.5: P8_2.7@71,98.38 P8_2.8@73.54,98.38 78.88,98.38 80.1,99.6 FU2_2.1@80.1,100.25 ; FU2_2.1@80.1,100.703 FU2_2.1@80.1,101.353
NetIC6_1_2: IC6_1.2 R19_1.2 | length 3.9
  Bottom Layer w0.4: R19_1.2@34,18.825 34.1,18.825 34.6,19.325 IC6_1.2@34.6,22.43
NetIC6_1_5: IC6_1.5 R17_1.1 | length 6.5
  Bottom Layer w0.4: R17_1.1@30,24 30,26.25 31,27.25 32.25,27.25 33,26.5 IC6_1.5@33,26
NetIC6_2_2: IC6_2.2 R19_2.2 | length 3.6
  Bottom Layer w0.4: IC6_2.2@236.4,29.215 236.4,26.075 236.65,25.825 R19_2.2@236.75,25.825
NetIC6_2_5: IC6_2.5 R17_2.1 | length 10.2
  Bottom Layer w0.4: R17_2.1@233,42.175 233.1,42.175 234.8,40.475 IC6_2.5@234.8,32.785
NetLD1_2: LD1.2 R1.1 | length 4.5
  Bottom Layer w0.25: LD1.2@198,36.54 198,40.825 R1.1@198.175,41
NetLD2_2: LD2.2 R2.1 | length 2.8
  Bottom Layer w0.25: LD2.2@198,48.48 198,45.925 R2.1@198.175,45.75
NetLD3_2: LD3.2 R3.1 | length 4.8
  Bottom Layer w0.25: R3.1@188.825,41 189,40.825 LD3.2@189,36.27
NetLD4_2: LD4.2 R5.1 | length 2.8
  Bottom Layer w0.25: R5.1@188.825,45.75 189,45.925 LD4.2@189,48.5
NetP15_1_4: P15_1.4
NetP15_1_6: P15_1.6 P16_1.6 | length 84.4
  Top Layer w0.5: P15_1.6@20.91,79.277 20.91,123.91 44.65,147.65 48.68,147.65 50.02,148.99 P16_1.6@50.27,148.99
NetP15_1_7: P15_1.7 P16_1.7 | length 79.9
  Top Layer w0.5: P15_1.7@23.45,76.737 23.45,76.987 24.79,78.327 24.79,123.76 47.48,146.45 P16_1.7@47.73,146.45
NetP15_1_11: P15_1.11 P16_1.11 | length 73.8
  Top Layer w0.5: P15_1.11@28.53,76.737 28.53,76.987 27.33,78.187 27.33,80.024 27.75,80.444 27.75,121.787 47.333,141.37 P16_1.11@47.73,141.37
NetP15_1_12: P15_1.12 P16_1.12 | length 72.2
  Top Layer w0.5: P15_1.12@28.53,79.277 28.53,121.577 46.983,140.03 48.68,140.03 50.02,141.37 P16_1.12@50.27,141.37
NetP15_1_13: P15_1.13
NetP15_1_14: P15_1.14 P16_1.14 | length 68.6
  Top Layer w0.5: P15_1.14@31.07,79.277 31.07,121.577 47.123,137.63 48.82,137.63 50.02,138.83 P16_1.14@50.27,138.83
NetP15_1_15: P15_1.15 P16_1.15 | length 66.6
  Top Layer w0.5: P15_1.15@33.61,76.737 33.61,76.987 32.41,78.187 32.41,121.367 47.333,136.29 P16_1.15@47.73,136.29
NetP15_1_16: P15_1.16 P16_1.16 | length 65.1
  Top Layer w0.5: P15_1.16@33.61,79.277 33.61,121.577 46.983,134.95 48.68,134.95 50.02,136.29 P16_1.16@50.27,136.29
NetP15_1_17: P15_1.17 P16_1.17 | length 63
  Top Layer w0.5: P15_1.17@36.15,76.737 36.15,76.987 34.95,78.187 34.95,121.367 47.333,133.75 P16_1.17@47.73,133.75
NetP15_1_18: P15_1.18 P16_1.18 | length 61.5
  Top Layer w0.5: P15_1.18@36.15,79.277 36.15,121.577 46.983,132.41 48.68,132.41 50.02,133.75 P16_1.18@50.27,133.75
NetP15_1_19: P15_1.19 P16_1.19 | length 59.4
  Top Layer w0.5: P15_1.19@38.69,76.737 38.69,76.987 37.49,78.187 37.49,121.367 47.333,131.21 P16_1.19@47.73,131.21
NetP15_1_20: P15_1.20 P16_1.20 | length 57.9
  Top Layer w0.5: P15_1.20@38.69,79.277 38.69,121.577 46.983,129.87 48.68,129.87 50.02,131.21 P16_1.20@50.27,131.21
NetP15_1_21: P15_1.21 P16_1.21 | length 55.9
  Top Layer w0.5: P15_1.21@41.23,76.737 41.23,76.987 39.98,78.237 39.98,121.317 47.333,128.67 P16_1.21@47.73,128.67
NetP15_1_22: P15_1.22 P16_1.22 | length 54.7
  Top Layer w0.5: P15_1.22@41.23,79.277 41.23,79.798 40.68,80.348 40.68,121.027 46.983,127.33 48.68,127.33 50.02,128.67 P16_1.22@50.27,128.67
NetP15_1_23: P15_1.23 P16_1.23 | length 53.2
  Top Layer w0.5: P15_1.23@43.77,76.737 43.77,76.987 42.57,78.187 42.57,79.93 41.38,81.12 41.38,120.03 47.48,126.13 P16_1.23@47.73,126.13
NetP15_1_24: P15_1.24
NetP15_1_26: P15_1.26 P16_1.26 | length 50.6
  Top Layer w0.5: P15_1.26@46.31,79.277 46.31,81.44 42.08,85.67 42.08,117.347 47.123,122.39 48.82,122.39 50.02,123.59 P16_1.26@50.27,123.59
NetP15_1_27: P15_1.27 P16_1.27 | length 49.1
  Top Layer w0.5: P16_1.27@47.73,121.05 47.333,121.05 42.78,116.497 42.78,85.98 47.51,81.25 47.51,78.327 48.85,76.987 P15_1.27@48.85,76.737
NetP15_1_28: P15_1.28 P16_1.28 | length 48
  Top Layer w0.5: P15_1.28@48.85,79.277 48.85,80.9 43.48,86.27 43.48,116.207 47.123,119.85 48.82,119.85 50.02,121.05 P16_1.28@50.27,121.05
NetP15_1_29: P15_1.29 P16_1.29 | length 48.5
  Top Layer w0.5: P16_1.29@47.73,118.51 47.48,118.51 44.18,115.21 44.18,86.59 49.67,81.1 50.42,81.1 51.514,81.1 52.59,80.024 52.59,78.187 51.39,76.987 P15_1.29@51.39,76.737
NetP15_1_30: P15_1.30
NetP15_1_31: P15_1.31
NetP15_1_32: P15_1.32
NetP15_1_33: P15_1.33
NetP15_1_34: P15_1.34 P16_1.34 | length 45
  Top Layer w0.5: P16_1.34@50.27,113.43 50.02,113.43 48.82,112.23 46.73,112.23 44.88,110.38 44.88,86.88 49.96,81.8 50.71,81.8 54.197,81.8 56.47,79.527 P15_1.34@56.47,79.277
NetP15_1_35: P15_1.35 P16_1.35 | length 44
  Top Layer w0.5: P16_1.35@47.73,110.89 47.48,110.89 45.58,108.99 45.58,87.17 50.25,82.5 55.75,82.5 57.81,80.44 57.81,78.187 59.01,76.987 P15_1.35@59.01,76.737
NetP15_1_36: P15_1.36
NetP15_1_37: P15_1.37
NetP15_1_38: P15_1.38
NetP15_1_39: P15_1.39
NetP15_1_40: P15_1.40
NetP15_1_41: P15_1.41
NetP15_2_4: P15_2.4
NetP15_2_6: P15_2.6 P16_2.6 | length 14
  Top Layer w0.5: P16_2.6@183.81,122.27 183.81,122.02 182.61,120.82 182.61,111.14 183.506,110.244 183.506,110.202 183.91,109.798 P15_2.6@183.91,109.277
NetP15_2_7: P15_2.7 P16_2.7 | length 13.9
  Top Layer w0.5: P16_2.7@186.35,119.73 186.159,119.539 186.159,118.659 185.25,117.75 185.25,108.187 186.45,106.987 P15_2.7@186.45,106.737
NetP15_2_11: P15_2.11 P16_2.11 | length 13.9
  Top Layer w0.5: P16_2.11@191.43,119.73 191.43,119.209 191.019,118.799 191.019,118.769 190.33,118.08 190.33,108.187 191.53,106.987 P15_2.11@191.53,106.737
NetP15_2_12: P15_2.12 P16_2.12 | length 13.9
  Top Layer w0.5: P16_2.12@191.43,122.27 191.43,122.02 192.63,120.82 192.63,110.627 191.53,109.527 P15_2.12@191.53,109.277
NetP15_2_13: P15_2.13
NetP15_2_14: P15_2.14 P16_2.14 | length 13.9
  Top Layer w0.5: P16_2.14@193.97,122.27 193.97,122.02 195.17,120.82 195.17,110.774 194.07,109.674 P15_2.14@194.07,109.277
NetP15_2_15: P15_2.15 P16_2.15 | length 13.9
  Top Layer w0.5: P16_2.15@196.51,119.73 196.51,111.124 195.41,110.024 195.41,108.187 196.61,106.987 P15_2.15@196.61,106.737
NetP15_2_16: P15_2.16 P16_2.16 | length 13.9
  Top Layer w0.5: P16_2.16@196.51,122.27 196.51,122.02 197.71,120.82 197.71,118.983 197.21,118.483 197.21,110.32 196.61,109.72 P15_2.16@196.61,109.277
NetP15_2_17: P15_2.17 P16_2.17 | length 13.9
  Top Layer w0.5: P16_2.17@199.05,119.73 199.05,119.333 197.95,118.233 197.95,108.187 199.15,106.987 P15_2.17@199.15,106.737
NetP15_2_18: P15_2.18 P16_2.18 | length 14
  Top Layer w0.5: P16_2.18@199.05,122.27 199.05,122.02 200.25,120.82 200.25,118.983 199.547,118.28 199.53,118.28 199.15,117.9 P15_2.18@199.15,109.277
NetP15_2_19: P15_2.19 P16_2.19 | length 13.9
  Top Layer w0.5: P16_2.19@201.59,119.73 201.59,119.333 200.49,118.233 200.49,108.187 201.69,106.987 P15_2.19@201.69,106.737
NetP15_2_20: P15_2.20 P16_2.20 | length 13.9
  Top Layer w0.5: P16_2.20@201.59,122.27 201.59,122.02 202.79,120.82 202.79,110.774 201.69,109.674 P15_2.20@201.69,109.277
NetP15_2_21: P15_2.21 P16_2.21 | length 13.9
  Top Layer w0.5: P16_2.21@204.13,119.73 204.13,111.124 203.03,110.024 203.03,108.187 204.23,106.987 P15_2.21@204.23,106.737
NetP15_2_22: P15_2.22 P16_2.22 | length 13.9
  Top Layer w0.5: P16_2.22@204.13,122.27 204.13,122.02 205.33,120.82 205.33,110.627 204.23,109.527 P15_2.22@204.23,109.277
NetP15_2_23: P15_2.23 P16_2.23 | length 14
  Top Layer w0.5: P16_2.23@206.67,119.73 206.861,119.539 206.861,118.639 207.97,117.53 207.97,108.187 206.77,106.987 P15_2.23@206.77,106.737
NetP15_2_24: P15_2.24
NetP15_2_26: P15_2.26 P16_2.26 | length 14
  Top Layer w0.5: P16_2.26@209.21,122.27 209.21,122.02 208.01,120.82 208.01,118.48 209.31,117.18 P15_2.26@209.31,109.277
NetP15_2_27: P15_2.27 P16_2.27 | length 14
  Top Layer w0.5: P16_2.27@211.75,119.73 211.75,119.209 213.05,117.909 213.05,108.187 211.85,106.987 P15_2.27@211.85,106.737
NetP15_2_28: P15_2.28 P16_2.28 | length 14
  Top Layer w0.5: P16_2.28@211.75,122.27 211.75,122.02 210.55,120.82 210.55,118.7 211.85,117.4 P15_2.28@211.85,109.277
NetP15_2_29: P15_2.29 P16_2.29 | length 14
  Top Layer w0.5: P16_2.29@214.29,119.73 214.29,119.46 215.59,118.16 215.59,108.187 214.39,106.987 P15_2.29@214.39,106.737
NetP15_2_30: P15_2.30
NetP15_2_31: P15_2.31
NetP15_2_32: P15_2.32
NetP15_2_33: P15_2.33
NetP15_2_34: P15_2.34 P16_2.34 | length 13.9
  Top Layer w0.5: P16_2.34@219.37,122.27 219.37,122.02 220.57,120.82 220.57,110.627 219.47,109.527 P15_2.34@219.47,109.277
NetP15_2_35: P15_2.35 P16_2.35 | length 14
  Top Layer w0.5: P16_2.35@221.91,119.73 221.91,119.34 223.21,118.04 223.21,108.187 222.01,106.987 P15_2.35@222.01,106.737
NetP15_2_36: P15_2.36
NetP15_2_37: P15_2.37
NetP15_2_38: P15_2.38
NetP15_2_39: P15_2.39
NetP15_2_40: P15_2.40
NetP15_2_41: P15_2.41
NetQ1_1_4: Q1_1.4 R17_1.2 | length 3.7
  Bottom Layer w0.4: Q1_1.4@26.4,22.495 28.995,22.495 29,22.5 29.85,22.5 R17_1.2@30,22.35
NetQ1_2_4: Q1_2.4 R17_2.2 | length 3.2
  Bottom Layer w0.4: R17_2.2@233,43.825 233.13,43.955 236.05,43.955 Q1_2.4@236.1,44.005
NetR4_1: R4.1 U1.4 | length 5.7
  Bottom Layer w0.25: U1.4@170.6,29.8 170.6,30.3 172.475,32.175 R4.1@175,32.175
NetR4_2: R4.2 R6.2 | length 2.3
  Bottom Layer w0.25: R4.2@175,33.825 R6.2@175,36.175
NetR9_1_1: R9_1.1 SB1_1.2 | length 2.1
  Bottom Layer w0.5: SB1_1.2@129.35,129.25 129.75,129.25 R9_1.1@131.425,129.25
NetR9_2_1: R9_2.1 SB1_2.2 | length 1.5
  Bottom Layer w0.5: 110.7,129.3 R9_2.1@112.2,129.3
NetR12_1_1: R12_1.1 SB2_1.2 | length 2.3
  Top Layer w0.5: 95,59.25 95.017,59.267 95.017,60.187 v1(95.04,60.21)
  Bottom Layer w0.5: R12_1.1@94.825,59 95.021,59.197 95.021,60.19 v1(95.04,60.21)
NetR12_2_1: R12_2.1 SB2_2.2 | length 2.2
  Top Layer w0.5: v1(136,60) 136,59.25 SB2_2.2@136.25,59
  Bottom Layer w0.5: R12_2.1@135.825,59 136,59.175 v1(136,60)
NetR13_1_1: R13_1.1 SB3_1.2 | length 2.3
  Top Layer w0.5: v1(114.25,57.75) 114.269,57.769 114.269,58.731
  Bottom Layer w0.5: R13_1.1@114.075,59 114.075,57.925 v1(114.25,57.75)
NetR13_2_1: R13_2.1 SB3_2.2 | length 2.6
  Top Layer w0.5: v1(153.25,58) 153.25,59.462 153.269,59.481
  Bottom Layer w0.5: R13_2.1@153.075,59 153.231,58.844 153.231,58.019 v1(153.25,58)
NetR14_1_1: R14_1.1 SB4_1.2 | length 2.1
  Bottom Layer w0.5: 56.7,48.8 56.75,48.85 R14_1.1@56.75,50.85
NetR14_2_1: R14_2.1 SB4_2.2 | length 1.7
  Bottom Layer w0.5: 214,84.5 R14_2.1@214,86.175
NetR15_1_1: R15_1.1 SB5_1.2 | length 2
  Bottom Layer w0.5: R15_1.1@56.75,59.85 56.75,57.95 56.8,57.9
NetR15_2_1: R15_2.1 SB5_2.2 | length 1.8
  Bottom Layer w0.5: 214,93.6 R15_2.1@214,95.375
NRST: P10.3
PA3: P13.1
PB0: P12.31
PB1: P12.7
PB2: P12.15
PB3: P11.15
PB4: P11.19
PB6: P12.13
PB8: P11.2
PB9: P11.4
PB10: P12.32
PB11: P12.34
PB12: P11.7
PB13: P11.5
PB15: P11.3
PC0: P13.3
PC2: P12.9
PC3: P13.5
PC6: P11.1
PC7: P11.11
PC8: P10.2
PC9: P10.4
PD0: IC3_2.3 P13.25 | length 37.3
  Top Layer w0.5: P13.25@100.74,71.6 102.08,72.94 125.94,72.94 v1(132.25,79.25)
  Bottom Layer w0.5: IC3_2.3@132.095,76.71 132.095,79.095 v1(132.25,79.25)
PD1: IC3_2.6 P13.27 | length 41.8
  Top Layer w0.5: P13.27@100.74,69.06 101.94,70.26 124.604,70.26 133.594,79.25 v1(135.75,79.25)
  Bottom Layer w0.5: v1(135.75,79.25) 135.905,79.095 IC3_2.6@135.905,76.71
PD2: P10.12
PD3: P13.10
PD5: IC3_1.6 P13.6 | length 34.6
  Top Layer w0.5: P13.6@103.28,97 117.412,97 117.693,96.72 v1(117.72,96.72)
  Bottom Layer w0.5: v1(117.72,96.72) 117.72,96.693 117.905,96.507 IC3_1.6@117.905,76.71
PD6: IC3_1.3 P13.4 | length 33.6
  Top Layer w0.5: P13.4@103.28,99.54 103.3,99.52 113.98,99.52 v1(114,99.5)
  Bottom Layer w0.5: v1(114,99.5) 114.095,99.405 IC3_1.3@114.095,76.71
PD14: P11.16
PD15: P11.18
PE0: P12.33
PE2: P13.14
PE7: P12.20
PE8: P12.18
PE9: P12.4
PE10: P12.24
PE11: P12.6
PE12: P12.26
PE13: P12.10
PE14: P12.28
PE15: P12.30
PF7: P13.26
PF12: P11.20
PF13: P12.2
PF14: P12.8
PF15: P12.12
PG0: P13.29
PG1: P13.30
RX+_1: F8_1.1 FV1_1.2 P7_1.1 | length 17.5
  Bottom Layer w0.5: P7_1.1@92.75,18 92.75,22.2 FV1_1.2@90.45,24.5 94,28.05 F8_1.1@94,33.05
RX+_2: F8_2.1 FV1_2.2 P7_2.1 | length 19.7
  Bottom Layer w0.5: F8_2.1@135,33 134.42,33 133.745,32.325 133.745,31.745 132.2,30.2 FV1_2.2@132.2,24.5 132.583,24.117 133.133,24.117 P7_2.1@139.25,18
RX-_1: F9_1.1 FV1_1.1 P7_1.2 | length 18.3
  Bottom Layer w0.5: P7_1.2@96.25,18 96.25,18.35 102.05,24.15 FV1_1.1@102.05,24.5 100,26.55 F9_1.1@100,33.05
RX-_2: F9_2.1 FV1_2.1 P7_2.2 | length 16.9
  Bottom Layer w0.5: F9_2.1@141.25,33.05 141.83,33.05 142.505,32.375 142.505,31.795 143.8,30.5 FV1_2.1@143.8,24.5 143.8,19.293 142.75,18.243 P7_2.2@142.75,18
TX+_1: F10_1.1 FV2_1.1 P7_1.3 | length 18.9
  Bottom Layer w0.5: P7_1.3@99.75,18 99.75,18.4 105.45,24.1 FV2_1.1@105.45,24.5 109,28.05 F10_1.1@109,33.05
TX+_2: F10_2.1 FV2_2.1 P7_2.3 | length 17
  Bottom Layer w0.5: P7_2.3@146.25,18 146.25,18.343 147.2,19.293 FV2_2.1@147.2,24.5 147.2,30.85 149.4,33.05 F10_2.1@150,33.05
TX-_1: F11_1.1 FV2_1.2 P7_1.4 | length 25.9
  Bottom Layer w0.5: P7_1.4@103.25,18 109.75,24.5 FV2_1.2@117.05,24.5 115,26.55 F11_1.1@115,33.05
TX-_2: F11_2.1 FV2_2.2 P7_2.4 | length 21.8
  Bottom Layer w0.75: P7_2.4@149.75,18 155.951,24.201 158.501,24.201 FV2_2.2@158.8,24.5 158.8,30.25 157.15,31.9 157.15,32.5 156.6,33.05 F11_2.1@156,33.05
VIN: P10.13
pads on no net: IC1_1.1 IC1_2.1 IC2_1.5 IC2_1.6 IC2_2.5 IC2_2.6 IC4_1.5 IC4_1.6 IC4_2.5 IC4_2.6 IC5_1.5 IC5_1.6 IC5_2.5 IC5_2.6 IC6_1.7 IC6_2.7 MNT1.1 MNT1_1.1 MNT2.1 MNT2_1.1 MNT3.1 MNT3_1.1 MNT3_2.1 MNT3_3.1 MNT3_4.1 MNT3_5.1 MNT3_6.1 MNT3_7.1 MNT3_8.1 MNT3_9.1 MNT4.1 MNT4_1.1 MNT4_2.1 MNT4_3.1 P7_1.6 P7_2.6 P10.15 P11.6 P11.14 P12.1 P12.11 P12.14 P12.16 P12.19 P12.21 P12.23 P12.25 P12.29 P13.7 P13.9 P13.11 P13.13 P13.15 P13.17 P13.19 P13.21 P14_1.1 P14_1.4 P14_1.5 P14_1.6 P14_1.7 P14_1.9 P14_1.10 P14_1.11 P14_1.12 P14_1.13 P14_1.14 P14_1.15 P14_1.16 P14_1.17 P14_1.18 P14_1.19 P14_1.20 P14_1.21 P14_1.22 P14_1.23 P14_1.24 P14_1.25 P14_1.26 P14_1.27 P14_1.28 P14_1.29 P14_1.34 P14_1.35 P14_1.36 P14_1.37 P14_1.38 P14_1.39 P14_1.40 P14_1.41 P14_2.1 P14_2.4 P14_2.5 P14_2.6 P14_2.7 P14_2.9 P14_2.10 P14_2.11 P14_2.12 P14_2.13 P14_2.14 P14_2.15 P14_2.16 P14_2.17 P14_2.18 P14_2.19 P14_2.20 P14_2.21 P14_2.22 P14_2.23 P14_2.24 P14_2.25 P14_2.26 P14_2.27 P14_2.28 P14_2.29 P14_2.34 P14_2.35 P14_2.36 P14_2.37 P14_2.38 P14_2.39 P14_2.40 P14_2.41 P15_1.5 P15_1.8 P15_1.9 P15_1.10 P15_1.25 P15_2.5 P15_2.8 P15_2.9 P15_2.10 P15_2.25 P16_1.4 P16_1.5 P16_1.8 P16_1.9 P16_1.10 P16_1.13 P16_1.24 P16_1.25 P16_1.30 P16_1.31 P16_1.32 P16_1.33 P16_1.36 P16_1.37 P16_1.38 P16_1.39 P16_1.40 P16_1.41 P16_2.4 P16_2.5 P16_2.8 P16_2.9 P16_2.10 P16_2.13 P16_2.24 P16_2.25 P16_2.30 P16_2.31 P16_2.32 P16_2.33 P16_2.36 P16_2.37 P16_2.38 P16_2.39 P16_2.40 P16_2.41 P18_1.3 P18_1.4 P18_1.5 P18_1.6 P18_1.7 P18_2.3 P18_2.4 P18_2.5 P18_2.6 P18_2.7 U1.5

## Polygon pours and split planes (outlines as drawn)
GND on Top Layer "GND_L01_P001" (solid, remove dead copper, pour order 1): 0.5,169.5 247.5,169.5 247.5,10.5 0.5,10.5
GND on Bottom Layer "GND_L02_P000" (solid, remove dead copper, pour order 0): 0.5,169.5 247.5,169.5 247.5,10.5 0.5,10.5

## Keep-outs
Keep-Out Layer:
  the board outline again, w0.254

## Silkscreen, mask and mechanical layers (free items; w line width, h text height)
Top Overlay:
  drawing of 126 lines, arcs and shapes, not listed
  text "AZ_ABS_ENC" at 69.754,167.008 h1.52
  text "clk+" at 71.754,164.254 h1.52
  text "clk-" at 78.754,164.254 h1.52
  text "data+" at 70.254,161.754 h1.52
  text "data-" at 78.754,161.754 h1.52
  text "ccw_in" at 68.754,159.508 h1.52
  text "GND" at 78.754,159.254 h1.52
  text "Universal Power / Stage 10/70 - EVAL /  / Interface: / Inverter PWM /  / Voltage: / 5...70V /  / Phase Current: / 10A /  / www.trinamic.com" at 191.164,157.926 h1.2 r270
  text "GND" at 72.754,156.754 h1.52
  text "GND" at 78.754,156.754 h1.52
  text "AZ 36V/5A" at 29.746,156.254 h1.52 r90
  text "+5V" at 72.754,154.254 h1.52
  text "+5V" at 78.754,154.254 h1.52
  text "GND" at 43.246,151.254 h1.52 r90
  text "+36V" at 39.246,150.254 h1.52 r90
  text "EL 36V/5A" at 234.254,139.754 h1.52
  text "+36V" at 226.254,131.754 h1.52
  text "EL_ABS_ENC" at 79.492,131.254 h1.52 r90
  text "GND" at 227.254,127.754 h1.52
  text "AZ_INC_ENC" at 68.754,126.008 h1.52
  text "A+" at 70.754,123.254 h1.52
  text "A-" at 77.754,123.254 h1.52
  text "B+" at 70.754,120.754 h1.52
  text "B-" at 77.754,120.754 h1.52
  text "GND" at 70.754,117.754 h1.52
  text "GND" at 77.754,117.754 h1.52
  text "+5V" at 70.254,115.254 h1.52
  text "+5V" at 78.254,115.254 h1.52
  text "Universal Power / Stage 10/70 - EVAL /  / Interface: / Inverter PWM /  / Voltage: / 5...70V /  / Phase Current: / 10A /  / www.trinamic.com" at 13.824,112.664 h1.2
  text "EL_INC_ENC" at 79.492,93.754 h1.52 r90
  text "ctrl_rx" at 94.254,60.508 h1.52
  text "ctrl_tx" at 110.754,60.508 h1.52
  text "tlmtr_rx" at 131.754,60.508 h1.52
  text "tlmtr_tx" at 147.754,60.508 h1.52
  text "EL 36V/5A" at 208.504,56.754 h1.52
  text "+5V" at 186.004,52.504 h1.52
  text "+36V_EL" at 192.254,52.508 h1.52
  text "AZ 36V/5A" at 208.754,42.504 h1.52
  text "EL brake resistor" at 235.25,41.5 h1.52
  text "+36V_AZ" at 192.254,38.258 h1.52
  text "+12V" at 185.754,38.004 h1.52
  text "GND" at 219.746,24.754 h1.52 r90
  text "+36V" at 223.746,24.504 h1.52 r90
  text "az_drv_sck" at 122.683,23.4 h1 r90
  text "az_drv_sck" at 125.183,23.4 h1 r90
  text "el_drv_sck" at 127.933,23.4 h1 r90
  text "el_drv_sck" at 130.433,23.4 h1 r90
  text "GND" at 203.496,22.004 h1.52 r90
  text "+12V" at 207.496,21.754 h1.52 r90
  text "RS422" at 69.754,18.754 h1.52
  text "12V/1A" at 172.004,13.754 h1.52
  text "AZ brake resistor" at 0.5,12.75 h1.52
  text "RX+" at 70.746,12.754 h1.52 r90
  text "RX-" at 73.746,12.754 h1.52 r90
  text "TX+" at 76.746,12.754 h1.52 r90
  text "TX-" at 79.746,12.754 h1.52 r90
  text "PN" at 82.746,12.754 h1.52 r90
  text "nc" at 85.246,12.754 h1.52 r90
  text "sck_F8" at 122.683,11.65 h1 r90
  text "sck_E5" at 125.183,11.65 h1 r90
  text "sck_F8" at 127.683,11.65 h1 r90
  text "sck_E5" at 130.183,11.65 h1 r90
  text "CTRL" at 114.746,11.254 h1.52 r90
  text "TLMTR" at 160.746,10.254 h1.52 r90